# EAGLE board ranback_top (EAGLE 9.6.2)
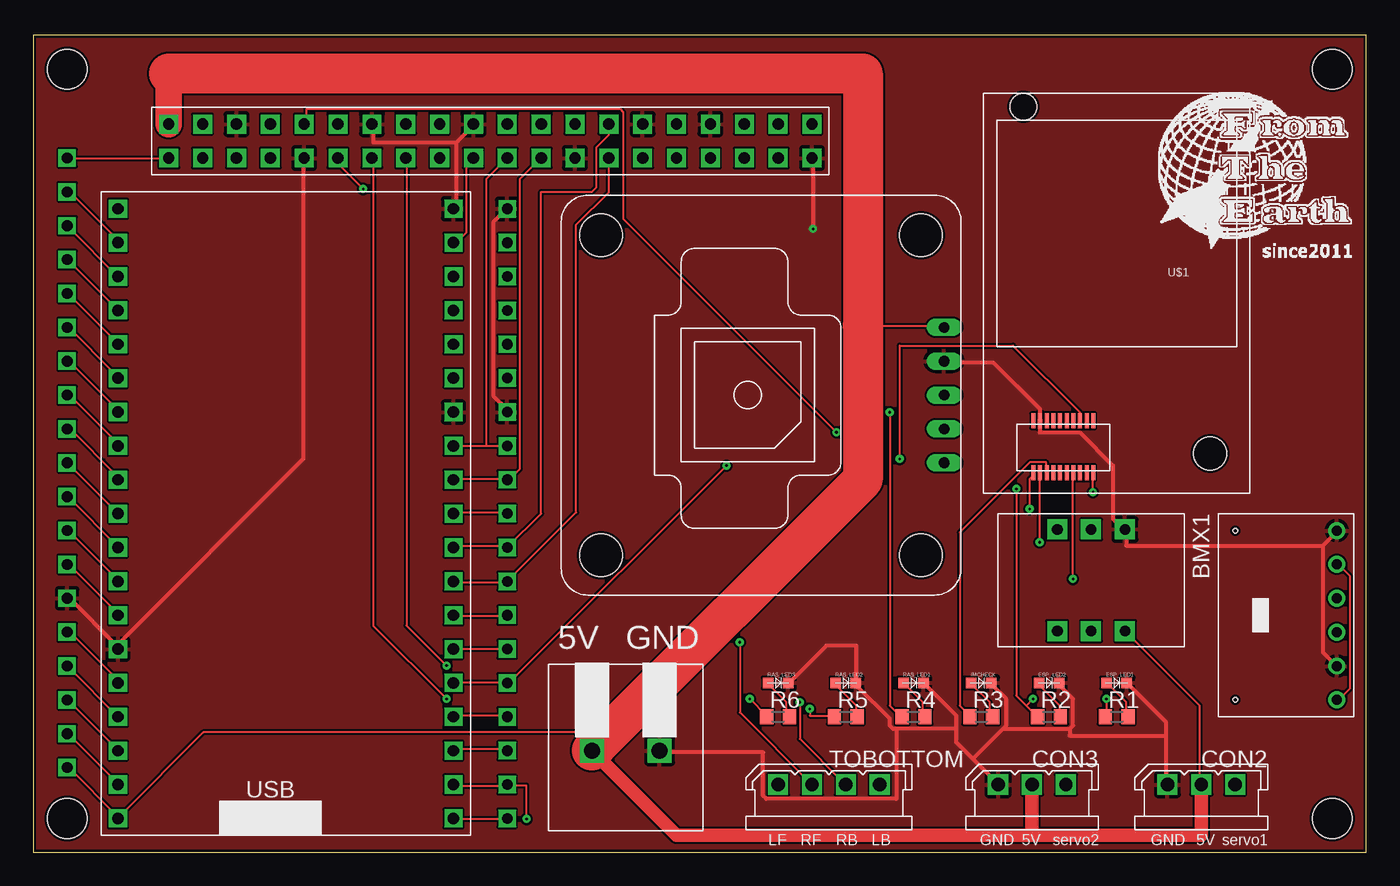
[diagram p0: board, top side]
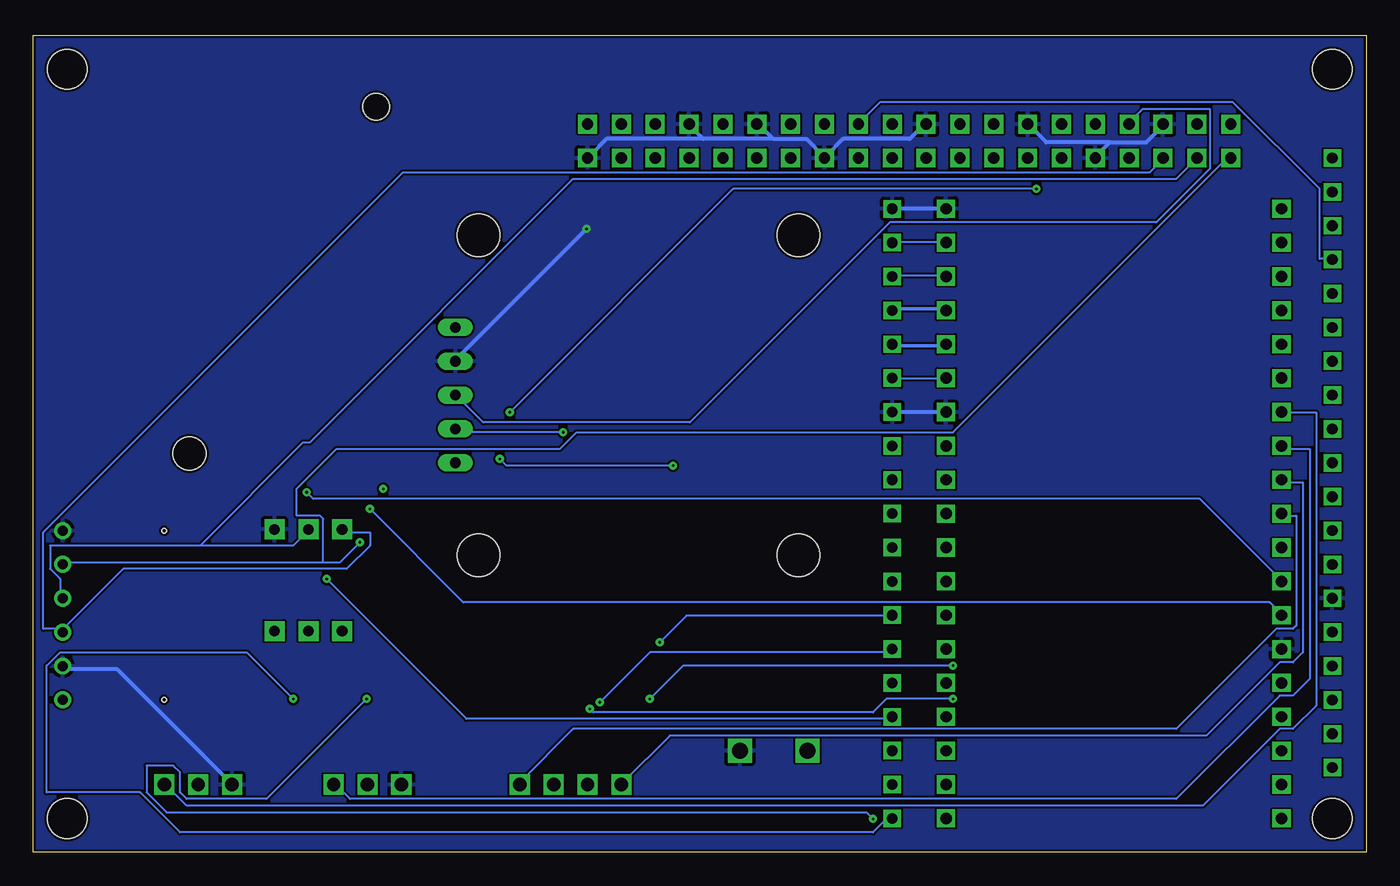
[diagram p1: board, bottom side, seen from below]

Size 100 x 61.27 mm. Coordinates in mm from the lower left corner, seen from the top.
Outline: 0,0 100,0 100,61.27 0,61.27 0,0
Copper layers (1*16): Top 0.035mm / dielectric 1.5mm / Bottom 0.035mm
Design rules "PCBGoGo": minimum track width 6mil, minimum drill 0.2mm, track to track 6mil, track to pad 6mil, pad to pad 6mil, via to via 6mil, smd to smd 6mil, copper to edge 0.2mm, drill to drill 6mil, minimum pad ring 10mil, minimum via ring 8mil, stop-mask expansion 4mil, vias tented up to drill 0mil, thermal gap 10mil
Net classes: 1 esp: width 0.254 mm, drill 0.127 mm, clearance 0.025 mm; 2 GND_+12V: width 0.305 mm
Holes 3 mm at 2.54,2.54 2.54,58.73 97.46,58.73 97.46,2.54

## Footprints (pad centres in the part's own frame; a part is rotated, then mirrored left to right if it is on the bottom)
BMX055 = drill 0.8 pad 1.5 square: 3V3 8.81,-9.53; GND 1.19,-4.46; SCL 1.19,-9.53; SDA 1.19,-7; VCC 8.81,-4.46; VCCIO 8.81,-7
2.5_MINI-SPOX_3PIN = drill 1 square: 1 -1.27,0; 2 1.27,0; 3 3.81,0
OSXX1608C1A = smd 0.8 x 0.8: AN -0.75,0; CT 0.75,0
AE-GYSFDMAXB = drill 0.8 long: P1 13.716,5.08; P2 13.716,2.54; P3 13.716,0; P4 13.716,-2.54; P5 13.716,-5.08 | hole 3.2: -12,12; 12,12; 12,-12; -12,-12
IM920C = smd 0.3 x 1.1: $P1 -1.75,-13.45; $P2 -1.75,-9.55; $P3 -2.25,-13.45; $P4 -2.25,-9.55; $P5 -2.75,-13.45; $P6 -2.75,-9.55; $P7 -3.25,-13.45; $P8 -3.25,-9.55; $P9 -3.75,-13.45; $P10 -3.75,-9.55; $P11 -4.25,-13.45; $P12 -4.25,-9.55; $P13 -4.75,-13.45; $P14 -4.75,-9.55; $P15 -5.25,-13.45; $P16 -5.25,-9.55; $P17 -5.75,-13.45; $P18 -5.75,-9.55; $P19 -6.25,-13.45; $P20 -6.25,-9.55 | hole 2.5: 7,-12 | hole 2: -7,14
19_2.54 = drill 0.8 pad 1.27 square: 1 0,12.7; 2 0,10.16; 3 0,7.62; 4 0,5.08; 5 0,2.54; 6 0,0; 7 0,-2.54; 8 0,-5.08; 9 0,-7.62; 10 0,-10.16; 11 0,-12.7; 12 0,-15.24; 13 0,-17.78; 14 0,-20.32; 15 0,-22.86; 16 0,-25.4; 17 0,-27.94; 18 0,-30.48; 19 0,-33.02
R0603 = smd 1 x 1.1: 1 -0.85,0; 2 0.85,0
RASPBERRYPI4B = drill 0.85 pad 1.422 square: 3V3_1 -2.54,-2.54; 3V3_2 -2.54,-22.86; 5V_1 0,-2.54; 5V_2 0,-5.08; GND_1 0,-7.62; GND_2 0,-17.78; GND_3 0,-25.4; GND_4 0,-38.1; GND_5 0,-43.18; GND_6 -2.54,-12.7; GND_7 -2.54,-33.02; GND_8 -2.54,-50.8; GPIO0 -2.54,-35.56; GPIO1 0,-35.56; GPIO2 -2.54,-5.08; GPIO3 -2.54,-7.62; GPIO4 -2.54,-10.16; GPIO5 -2.54,-38.1; GPIO6 -2.54,-40.64; GPIO7 0,-33.02; GPIO8 0,-30.48; GPIO9 -2.54,-27.94; GPIO10 -2.54,-25.4; GPIO11 -2.54,-30.48; GPIO12 0,-40.64; GPIO13 -2.54,-43.18; GPIO14 0,-10.16; GPIO15 0,-12.7; GPIO16 0,-45.72; GPIO17 -2.54,-15.24; GPIO18 0,-15.24; GPIO19 -2.54,-45.72; GPIO20 0,-48.26; GPIO21 0,-50.8; GPIO22 -2.54,-20.32; GPIO23 0,-20.32; GPIO24 0,-22.86; GPIO25 0,-27.94; GPIO26 -2.54,-48.26; GPIO27 -2.54,-17.78
TERMINAL_SLOPED_2PIN = drill 1.2 square: 1 -2.54,0; 2 2.54,0
2.5_MINI-SPOX_4PIN = drill 1 square: P$1 -1.27,0; P$2 6.35,0; P$3 1.27,0; P$4 3.81,0
ESP32 = drill 0.85 square: 3.3V 1.27,46.99; 5V 1.27,1.27; EN 1.27,44.45; GND1 1.27,13.97; GND2 26.44,46.99; GND3 26.44,31.75; GPIO0 26.44,13.97; GPIO2 26.44,11.43; GPIO4 26.44,16.51; GPIO5 26.44,24.13; GPIO6 26.44,1.27; GPIO7 26.44,3.81; GPIO8 26.44,6.35; GPIO9 1.27,8.89; GPIO10 1.27,6.35; GPIO11 1.27,3.81; GPIO12 1.27,16.51; GPIO13 1.27,11.43; GPIO14 1.27,19.05; GPIO15 26.44,8.89; GPIO16 26.44,19.05; GPIO17 26.44,21.59; GPIO18 26.44,26.67; GPIO19 26.44,29.21; GPIO21 26.44,34.29; GPIO22 26.44,41.91; GPIO23 26.44,44.45; GPIO25 1.27,26.67; GPIO26 1.27,24.13; GPIO27 1.27,21.59; GPIO32 1.27,31.75; GPIO33 1.27,29.21; GPIO34 1.27,36.83; GPIO35 1.27,34.29; GPIO36 1.27,41.91; GPIO39 1.27,39.37; RX 26.44,36.83; TX 26.44,39.37
GY-BMP280-FOOTPRINT = drill 0.75 pad 1.27: CSB 11.43,0; GND 3.81,0; SCK 6.35,0; SDI 8.89,0; SDO 13.97,0; VCC 1.27,0 | hole 0.35: 1.27,7.62; 13.97,7.62

## Placement (x,y rotation side)
BMX1  BMX055  [BMX055]  86.36,25.4 270 top
CON2  [2.5_MINI-SPOX_3PIN]  86.36,5.08 0 top
CON3  [2.5_MINI-SPOX_3PIN]  73.66,5.08 0 top
ESP_LED1  OSXX1608C1A  [OSXX1608C1A]  81.28,12.7 0 top
ESP_LED2  OSXX1608C1A  [OSXX1608C1A]  76.2,12.7 0 top
GPS  AE-GYSFDMAXB  [AE-GYSFDMAXB]  54.61,34.29 0 top
IM  IM920C  [IM920C]  81.28,41.91 0 top
IMCHECK  OSXX1608C1A  [OSXX1608C1A]  71.12,12.7 0 top
PIN_L  [19_2.54]  2.54,39.37 0 top
PIN_R  [19_2.54]  35.56,35.56 0 top
R1  1.5k  [R0603]  81.28,10.16 0 top
R2  1.5k  [R0603]  76.2,10.16 0 top
R3  1.5k  [R0603]  71.12,10.16 0 top
R4  1.5k  [R0603]  66.04,10.16 0 top
R5  1.5k  [R0603]  60.96,10.16 0 top
R6  1.5k  [R0603]  55.88,10.16 0 top
RAS_LED1  OSXX1608C1A  [OSXX1608C1A]  66.04,12.7 0 top
RAS_LED2  OSXX1608C1A  [OSXX1608C1A]  60.96,12.7 0 top
RAS_LED3  OSXX1608C1A  [OSXX1608C1A]  55.88,12.7 0 top
RASPBERRYPI_4B  [RASPBERRYPI4B]  7.62,54.61 90 top
TM5  [TERMINAL_SLOPED_2PIN]  44.45,7.62 0 top
TOBOTTOM  [2.5_MINI-SPOX_4PIN]  57.15,5.08 0 top
U$1  [LOGO]  83.82,43.18 0 top
U$2  ESP32  [ESP32]  5.08,1.27 0 top
U$9  GY-BPM280  [GY-BMP280-FOOTPRINT]  97.79,10.16 90 top

## Library data of the parts
BMX1 = BMX055
CON2 CON3 TOBOTTOM = Connector
ESP_LED1 ESP_LED2 IMCHECK RAS_LED1-RAS_LED3 = ChipLED
GPS = AE-GYSFDMAXB
IM = IM920
PIN_L PIN_R = JumperPins
R1-R6 = rcl; SPICEPREFIX: R
RASPBERRYPI_4B = RASPBERRYPI4B
TM5 = TerminalBrock
U$1 = logo
U$2 = ESP32_dev
U$9 = BMP280

## Nets
3V3: BMX1.3V3
+3V3: IM.$P17 PIN_L.1 RASPBERRYPI_4B.3V3_1 U$9.CSB U$9.VCC
+5V: BMX1.VCC CON2.2 CON3.2 GPS.P1 PIN_L.19 RASPBERRYPI_4B.5V_1 TM5.1 U$2.5V
BB_SCL: BMX1.SCL RASPBERRYPI_4B.GPIO3 U$9.SCK
BB_SDA: BMX1.SDA RASPBERRYPI_4B.GPIO2 U$9.SDI
EN: PIN_L.2 U$2.EN
GND [GND_+12V]: BMX1.GND CON2.1 CON3.1 ESP_LED1.CT ESP_LED2.CT GPS.P2 IM.$P18 IMCHECK.CT PIN_L.14 PIN_R.1 PIN_R.7 RAS_LED1.CT RAS_LED2.CT RAS_LED3.CT RASPBERRYPI_4B.GND_1 RASPBERRYPI_4B.GND_2 RASPBERRYPI_4B.GND_3 RASPBERRYPI_4B.GND_4 RASPBERRYPI_4B.GND_5 RASPBERRYPI_4B.GND_6 RASPBERRYPI_4B.GND_7 RASPBERRYPI_4B.GND_8 TM5.2 U$2.GND1 U$2.GND2 U$2.GND3 U$9.GND U$9.SDO
GPS_RX: GPS.P3 RASPBERRYPI_4B.GPIO14
GPS_TX: GPS.P4 RASPBERRYPI_4B.GPIO15
IM_BUSY: IM.$P1 PIN_L.12 U$2.GPIO14
IM_RESET: IM.$P19 PIN_L.13 U$2.GPIO12
IM_RX: IM.$P6 PIN_R.15 U$2.GPIO2
IM_TX: IM.$P7 PIN_R.16 U$2.GPIO15
IO5: PIN_R.10 U$2.GPIO5
IO8: PIN_R.17 U$2.GPIO8
IO9: PIN_L.16 U$2.GPIO9
IO10: PIN_L.17 U$2.GPIO10
IO11: PIN_L.18 U$2.GPIO11
IO13: PIN_L.15 U$2.GPIO13
IO27: PIN_L.11 U$2.GPIO27
IO34: PIN_L.5 U$2.GPIO34
IO35: PIN_L.6 U$2.GPIO35
LED1: PIN_R.19 R1.1 U$2.GPIO6
LED2: PIN_R.18 R2.1 U$2.GPIO7
LED3: IM.$P15 R3.1
LED4: R4.1 RASPBERRYPI_4B.GPIO17
LED5: R5.1 RASPBERRYPI_4B.GPIO27
LED6: R6.1 RASPBERRYPI_4B.GPIO22
MD_LB: PIN_L.10 TOBOTTOM.P$2 U$2.GPIO26
MD_LF: PIN_L.9 TOBOTTOM.P$1 U$2.GPIO25
MD_RB: PIN_R.14 TOBOTTOM.P$4 U$2.GPIO0
MD_RF: PIN_R.13 TOBOTTOM.P$3 U$2.GPIO4
N$1: ESP_LED1.AN R1.2
N$2: ESP_LED2.AN R2.2
N$3: IMCHECK.AN R3.2
N$4: R4.2 RAS_LED1.AN
N$5: R5.2 RAS_LED2.AN
N$6: R6.2 RAS_LED3.AN
RP_MISO: PIN_R.8 RASPBERRYPI_4B.GPIO9 U$2.GPIO19
RP_MOSI: PIN_R.2 RASPBERRYPI_4B.GPIO10 U$2.GPIO23
RP_RX: PIN_R.11 RASPBERRYPI_4B.GPIO1 U$2.GPIO17
RP_SCK: PIN_R.9 RASPBERRYPI_4B.GPIO11 U$2.GPIO18
RP_SS: PIN_L.4 RASPBERRYPI_4B.GPIO8 U$2.GPIO39
RP_TX: PIN_R.12 RASPBERRYPI_4B.GPIO0 U$2.GPIO16
RXD [esp]: PIN_R.4 U$2.TX
SCL: PIN_R.3 U$2.GPIO22
SDA: PIN_R.6 U$2.GPIO21
SENSOR_VP: PIN_L.3 U$2.GPIO36
SERVO1: CON2.3 PIN_L.7 U$2.GPIO32
SERVO2: CON3.3 PIN_L.8 U$2.GPIO33
TXD [esp]: PIN_R.5 U$2.RX
VCCIO: BMX1.VCCIO

## Tracks (layer width: path | path; a pad name or v marks a point on that pad's centre or on a via)
+3V3  (via drill 0.2)
  Top 0.152: v75.5,23.25 75.5,28.25 IM.$P17 | U$9.VCC 98,11.5 98.75,12.25 98.75,20.75 98,21.5 U$9.CSB | PIN_L.1 3,52 10,52 RASPBERRYPI_4B.3V3_1
  Bottom 0.152: v75.5,23.25 77,21.75 78.25,21.75 | 78.25,21.75 97.75,21.75 U$9.CSB | 78.25,21.75 78.25,25 78.5,25.25 80.25,25.25 80.25,27.25 77.25,30.25 60.5,30.25 59.25,31.5 31,31.5 10.5,52 RASPBERRYPI_4B.3V3_1
+5V
  Top 0.152: PIN_L.19 2.75,6.25 6.25,2.75 U$2.5V 6.5,2.75 12.75,9 41.25,9 42.27,7.98 | 62.23,39.5 68.25,39.5 GPS.P1 | BMX1.VCC 82,16.5 87.5,11 87.5,5.5 CON2.2
  Top 1: TM5.1 48.26,1.27 74.93,1.27 | 74.93,1.27 CON3.2 | 74.93,1.27 87.63,1.27 CON2.2
  Top 2: RASPBERRYPI_4B.5V_1 10.16,58.42
  Top 3: 10.16,58.42 62.23,58.42 62.23,39.5 62.23,27.94 42.27,7.98 TM5.1
BB_SCL
  Bottom 0.152: BMX1.SCL 76.75,24 74.75,24 74.75,23 76.5,21.25 93.25,21.25 97.75,16.75 U$9.SCK 98,16.75 99.25,16.75 99.25,24 72.25,51 16.25,51 15.25,52 RASPBERRYPI_4B.GPIO3
BB_SDA
  Bottom 0.152: 87.5,23 80.5,23 79.5,24 BMX1.SDA | 87.5,23 98.75,23 98.75,21.25 98,20.5 98,19.25 U$9.SDI | 87.5,23 79.75,30.75 79.25,30.75 59.5,50.5 14.25,50.5 12.75,52 RASPBERRYPI_4B.GPIO2
EN
  Top 0.152: PIN_L.2 2.75,49.5 6.25,46 6.25,45.75 U$2.EN
GND  (via drill 0.2)
  Top 0.305: 85,8.75 85,5.25 CON2.1 | 85,8.75 85,9.75 82.25,12.5 ESP_LED1.CT | RAS_LED3.CT 56.75,12.75 59.5,15.5 61.75,15.5 61.75,12.75 RAS_LED2.CT 61.75,12.5 64.25,10 64.25,9.5 64.5,9.25 64.75,9.25 | 69.25,9.25 69.25,8.25 70.5,7 | 69.25,9.25 69.25,10.25 67,12.5 RAS_LED1.CT | 70.5,7 72.25,5.25 CON3.1 | 70.5,7 72.75,9.25 | 72.75,9.25 73,9.5 73,11.5 72,12.5 IMCHECK.CT | 77.75,9.25 78,9.5 78,11.5 77,12.5 ESP_LED2.CT | 72.75,9.25 77.75,9.25 | 69.25,9.25 64.75,9.25 | 64.75,9.25 64.75,4 55,4 54.75,4.25 54.75,7.5 47,7.5 TM5.2 | 85,8.75 77.75,8.75 77.75,9.25 | 96.75,23 96.75,15 97.75,14 U$9.GND | 96.75,23 97.75,24 U$9.SDO | GPS.P2 68.5,36.75 72,36.75 75.5,33.25 75.5,32.5 IM.$P18 75.5,32.25 75.5,31.5 78.5,31.5 81,29 81,25 81.75,24.25 BMX1.GND 82,24 82,23 96.75,23 | 31.75,53.25 33,54.5 RASPBERRYPI_4B.GND_3 | 31.75,53.25 31.75,48.5 U$2.GND2 | PIN_R.7 35.5,33.25 34.5,34.25 34.5,47.25 35.5,48.25 PIN_R.1 | 6.25,15.5 2.75,19 PIN_L.14 | 6.25,15.5 6.25,15.25 U$2.GND1 6.25,15.5 | 6.25,15.5 20.25,29.5 20.25,52 RASPBERRYPI_4B.GND_6 | 31.75,53.25 25.5,53.25 25.5,54.5 RASPBERRYPI_4B.GND_2 | v58.5,46.75 58.5,52 RASPBERRYPI_4B.GND_8
  Bottom 0.305: CON2.1 85.25,5.25 93.75,13.75 97.75,13.75 U$9.GND | 44.5,53.5 42,53.5 40.75,52.25 RASPBERRYPI_4B.GND_7 40.5,52.25 39.25,53.5 34.25,53.5 33.25,54.5 RASPBERRYPI_4B.GND_3 | 44.5,53.5 45.5,54.5 RASPBERRYPI_4B.GND_4 | 49.75,53.5 50.75,54.5 RASPBERRYPI_4B.GND_5 | 44.5,53.5 49.75,53.5 | 49.75,53.5 57,53.5 58.25,52.25 RASPBERRYPI_4B.GND_8 | PIN_R.7 35.5,33 31.75,33 U$2.GND3 | PIN_R.1 35.5,48.25 31.75,48.25 U$2.GND2 | 19.25,53.25 16.5,53.25 15.25,54.5 RASPBERRYPI_4B.GND_1 | 19.25,53.25 20.25,52.25 RASPBERRYPI_4B.GND_6 | 19.25,53.25 24,53.25 25.25,54.5 RASPBERRYPI_4B.GND_2 | v58.5,46.75 68.25,37 GPS.P2
  pour Top: -1.27,62.23 101.6,62.23 101.6,-2.54 -1.27,-2.54
  pour Bottom: -1.27,62.23 101.6,62.23 101.6,-1.27 -1.27,-1.27
GPS_RX
  Bottom 0.152: GPS.P3 68.25,34.25 66.25,32.25 50.75,32.25 35.75,47.25 15.75,47.25 11.75,51.25 11.75,55.75 16.75,55.75 17.75,54.75 RASPBERRYPI_4B.GPIO14
GPS_TX  (via drill 0.2)
  Top 0.152: v60.25,31.5 44.25,47.5 44.25,55.5 44,55.75 20.5,55.75 20.5,54.75 RASPBERRYPI_4B.GPIO15
  Bottom 0.152: v60.25,31.5 68,31.5 68.25,31.75 GPS.P4
IM_BUSY  (via drill 0.2)
  Top 0.152: v79.5,27 79.5,28.25 IM.$P1 | PIN_L.12 2.75,24 6.25,20.5 U$2.GPIO14
  Bottom 0.152: v79.5,27 79,26.5 12.5,26.5 6.5,20.5 U$2.GPIO14
IM_RESET  (via drill 0.2)
  Top 0.152: v74.75,25.75 74.75,28 75,28.25 IM.$P19 | PIN_L.13 2.75,21.5 6.25,18 U$2.GPIO12
  Bottom 0.152: v74.75,25.75 67.75,18.75 7.25,18.75 6.5,18 U$2.GPIO12
IM_RX  (via drill 0.2)
  Top 0.152: U$2.GPIO2 31.75,12.75 35.5,12.75 PIN_R.15 36,13 v52,29 | v65,29.5 65,38 73.5,38 78.5,33 78.5,32.5 IM.$P6
  Bottom 0.152: v65,29.5 64.5,29 v52,29
IM_TX  (via drill 0.2)
  Top 0.152: v78,20.5 78,28.25 IM.$P7 | U$2.GPIO15 31.75,10.25 35.5,10.25 PIN_R.16
  Bottom 0.152: v78,20.5 67.5,10 35.75,10 PIN_R.16
IO5
  Top 0.152: PIN_R.10 35.5,25.5 31.75,25.5 U$2.GPIO5
IO8
  Top 0.152: PIN_R.17 35.5,7.75 31.75,7.75 U$2.GPIO8
IO9
  Top 0.152: PIN_L.16 2.75,13.75 6.25,10.25 U$2.GPIO9
IO10
  Top 0.152: PIN_L.17 2.75,11.25 6.25,7.75 U$2.GPIO10
IO11
  Top 0.152: PIN_L.18 2.75,8.75 6.25,5.25 U$2.GPIO11
IO13
  Top 0.152: PIN_L.15 2.75,16.5 6.25,13 6.25,12.75 U$2.GPIO13
IO27
  Top 0.152: PIN_L.11 2.75,26.5 6.25,23 U$2.GPIO27
IO34
  Top 0.152: PIN_L.5 2.75,41.75 6,38.5 U$2.GPIO34
IO35
  Top 0.152: PIN_L.6 2.75,39.25 6,36 U$2.GPIO35
LED1  (via drill 0.2)
  Top 0.152: PIN_R.19 35.5,2.5 32,2.5 U$2.GPIO6 | v80.5,11.5 80.5,10.5 R1.1
  Bottom 0.152: v80.5,11.5 84,15 98,15 99,14 99,4.5 92,4.5 89,1.5 37,1.5 36,2.5 PIN_R.19
LED2  (via drill 0.2)
  Top 0.152: 74.5,11 73.75,11.75 v73.75,27.25 | 74.5,11 75.25,10.25 R2.1 | U$2.GPIO7 32,5 35.5,5 PIN_R.18 36,5 37,5 v37,2.5 | 74.5,11 v75,11.5
  Bottom 0.152: v37,2.5 37.5,3 90,3 91.5,4.5 91.5,6.5 89.5,6.5 89,6 89,4.5 88.5,4 82.5,4 v75,11.5
LED3
  Top 0.152: R3.1 70.25,10.25 69.5,11 69.5,24 74.75,29.25 76,29.25 76,28.5 IM.$P15
LED4  (via drill 0.2)
  Top 0.152: v64.25,33 64.25,11 65,10.25 R4.1 | v24.75,49.75 23,51.5 23,52 RASPBERRYPI_4B.GPIO17
  Bottom 0.152: v64.25,33 47.5,49.75 v24.75,49.75
LED5  (via drill 0.2)
  Top 0.152: v58.25,10.75 58.25,10.25 60,10.25 R5.1 | v31,11.5 25.5,17 25.5,52 RASPBERRYPI_4B.GPIO27
  Bottom 0.152: v58.25,10.75 58,10.5 37,10.5 36,11.5 v31,11.5
LED6  (via drill 0.2)
  Top 0.152: v53.75,11.5 55,10.25 R6.1 | v31,14 28,17 28,52 RASPBERRYPI_4B.GPIO22
  Bottom 0.152: v53.75,11.5 51.25,14 v31,14
MD_LB
  Top 0.152: U$2.GPIO26 PIN_L.10
  Bottom 0.152: TOBOTTOM.P$2 63.5,5.25 59.5,9.25 14.25,9.25 6.75,16.75 5.5,16.75 5.25,17 5.25,25.25 6.25,25.25 U$2.GPIO26
MD_LF
  Top 0.152: PIN_L.9 2.75,31.75 6.25,28.25 6.25,28 U$2.GPIO25
  Bottom 0.152: TOBOTTOM.P$1 55.75,5.25 52.25,8.75 12,8.75 6.5,14.25 5.5,14.25 4.75,15 4.75,27.75 6.25,27.75 U$2.GPIO25
MD_RB  (via drill 0.2)
  Top 0.152: PIN_R.14 35.5,15.25 31.75,15.25 U$2.GPIO0 | v57.5,11.25 57.5,8.5 60.75,5.25 TOBOTTOM.P$4
  Bottom 0.152: v57.5,11.25 53.75,15 35.75,15 PIN_R.14
MD_RF  (via drill 0.2)
  Top 0.152: PIN_R.13 35.5,17.75 31.75,17.75 U$2.GPIO4 | TOBOTTOM.P$3 53,10.5 v53,15.75
  Bottom 0.152: v53,15.75 51,17.75 35.75,17.75 PIN_R.13
N$1
  Top 0.152: ESP_LED1.AN 80.75,12.5 82,11.25 82,10.25 R1.2
N$2
  Top 0.152: ESP_LED2.AN 75.5,12.5 77,11 77,10.25 R2.2
N$3
  Top 0.152: IMCHECK.AN 70.5,12.5 71.75,11.25 71.75,10.25 R3.2
N$4
  Top 0.152: RAS_LED1.AN 65.5,12.5 66.75,11.25 66.75,10.25 R4.2
N$5
  Top 0.152: RAS_LED2.AN 60.25,12.5 61.75,11 61.75,10.25 R5.2
N$6
  Top 0.152: RAS_LED3.AN 55.25,12.5 56.5,11.25 56.5,10.25 R6.2
RP_MISO
  Top 0.152: 34,30.5 31.75,30.5 U$2.GPIO19 | 34,30.5 35.5,30.5 PIN_R.8 | 34,30.5 34,50.5 35.5,52 RASPBERRYPI_4B.GPIO9
RP_MOSI
  Top 0.152: RASPBERRYPI_4B.GPIO10 33,52 32.5,51.5 32.5,46.5 31.75,45.75 U$2.GPIO23
  Bottom 0.152: PIN_R.2 35.5,45.75 31.75,45.75 U$2.GPIO23
RP_RX
  Top 0.152: U$2.GPIO17 31.75,23 35.5,23 PIN_R.11 38.1,25.4 38.1,49.53 41.91,49.53 42.24,49.86 42.24,52.88 43.18,53.82 RASPBERRYPI_4B.GPIO1
RP_SCK
  Top 0.152: U$2.GPIO18 31.75,28 35.5,28 PIN_R.9 35.75,28 36.5,28.75 36.5,50.5 38,52 RASPBERRYPI_4B.GPIO11
RP_SS
  Top 0.152: PIN_L.4 2.75,44.25 6.25,40.75 U$2.GPIO39
  Bottom 0.152: RASPBERRYPI_4B.GPIO8 38,54.75 36.5,56.25 10,56.25 3.5,49.75 3.5,44.5 2.75,44.5 PIN_L.4
RP_TX
  Top 0.152: U$2.GPIO16 31.75,20.25 35.5,20.25 PIN_R.12 40.73,25.49 40.73,47.07 43.18,49.51 RASPBERRYPI_4B.GPIO0
RXD
  Bottom 0.254: PIN_R.4 35.5,40.75 31.75,40.75 U$2.TX
SCL
  Bottom 0.152: PIN_R.3 35.5,43.25 31.75,43.25 U$2.GPIO22
SDA
  Bottom 0.152: PIN_R.6 35.5,35.5 31.75,35.5 U$2.GPIO21
SENSOR_VP
  Top 0.152: PIN_L.3 2.75,46.75 6.25,43.25 U$2.GPIO36
SERVO1
  Top 0.152: PIN_L.7 2.75,36.75 6.25,33.25 U$2.GPIO32
  Bottom 0.152: CON2.3 90,5 88.5,3.5 12.25,3.5 6.5,9.25 5.5,9.25 3.75,11 3.75,33 6.25,33 U$2.GPIO32
SERVO2
  Top 0.152: PIN_L.8 2.75,34.25 6.25,30.75 6.25,30.5 U$2.GPIO33
  Bottom 0.152: CON3.3 77.25,5 76.25,4 14.25,4 6.5,11.75 5.5,11.75 4.25,13 4.25,30.25 6.25,30.25 U$2.GPIO33
TXD
  Bottom 0.254: PIN_R.5 35.5,38 31.75,38 U$2.RX

## Text on the board
tPlace: 5V | GND | LF | RF | RB | LB | GND | 5V | servo2 | GND | 5V | servo1